# EAGLE board schemat (EAGLE 9.1.3)
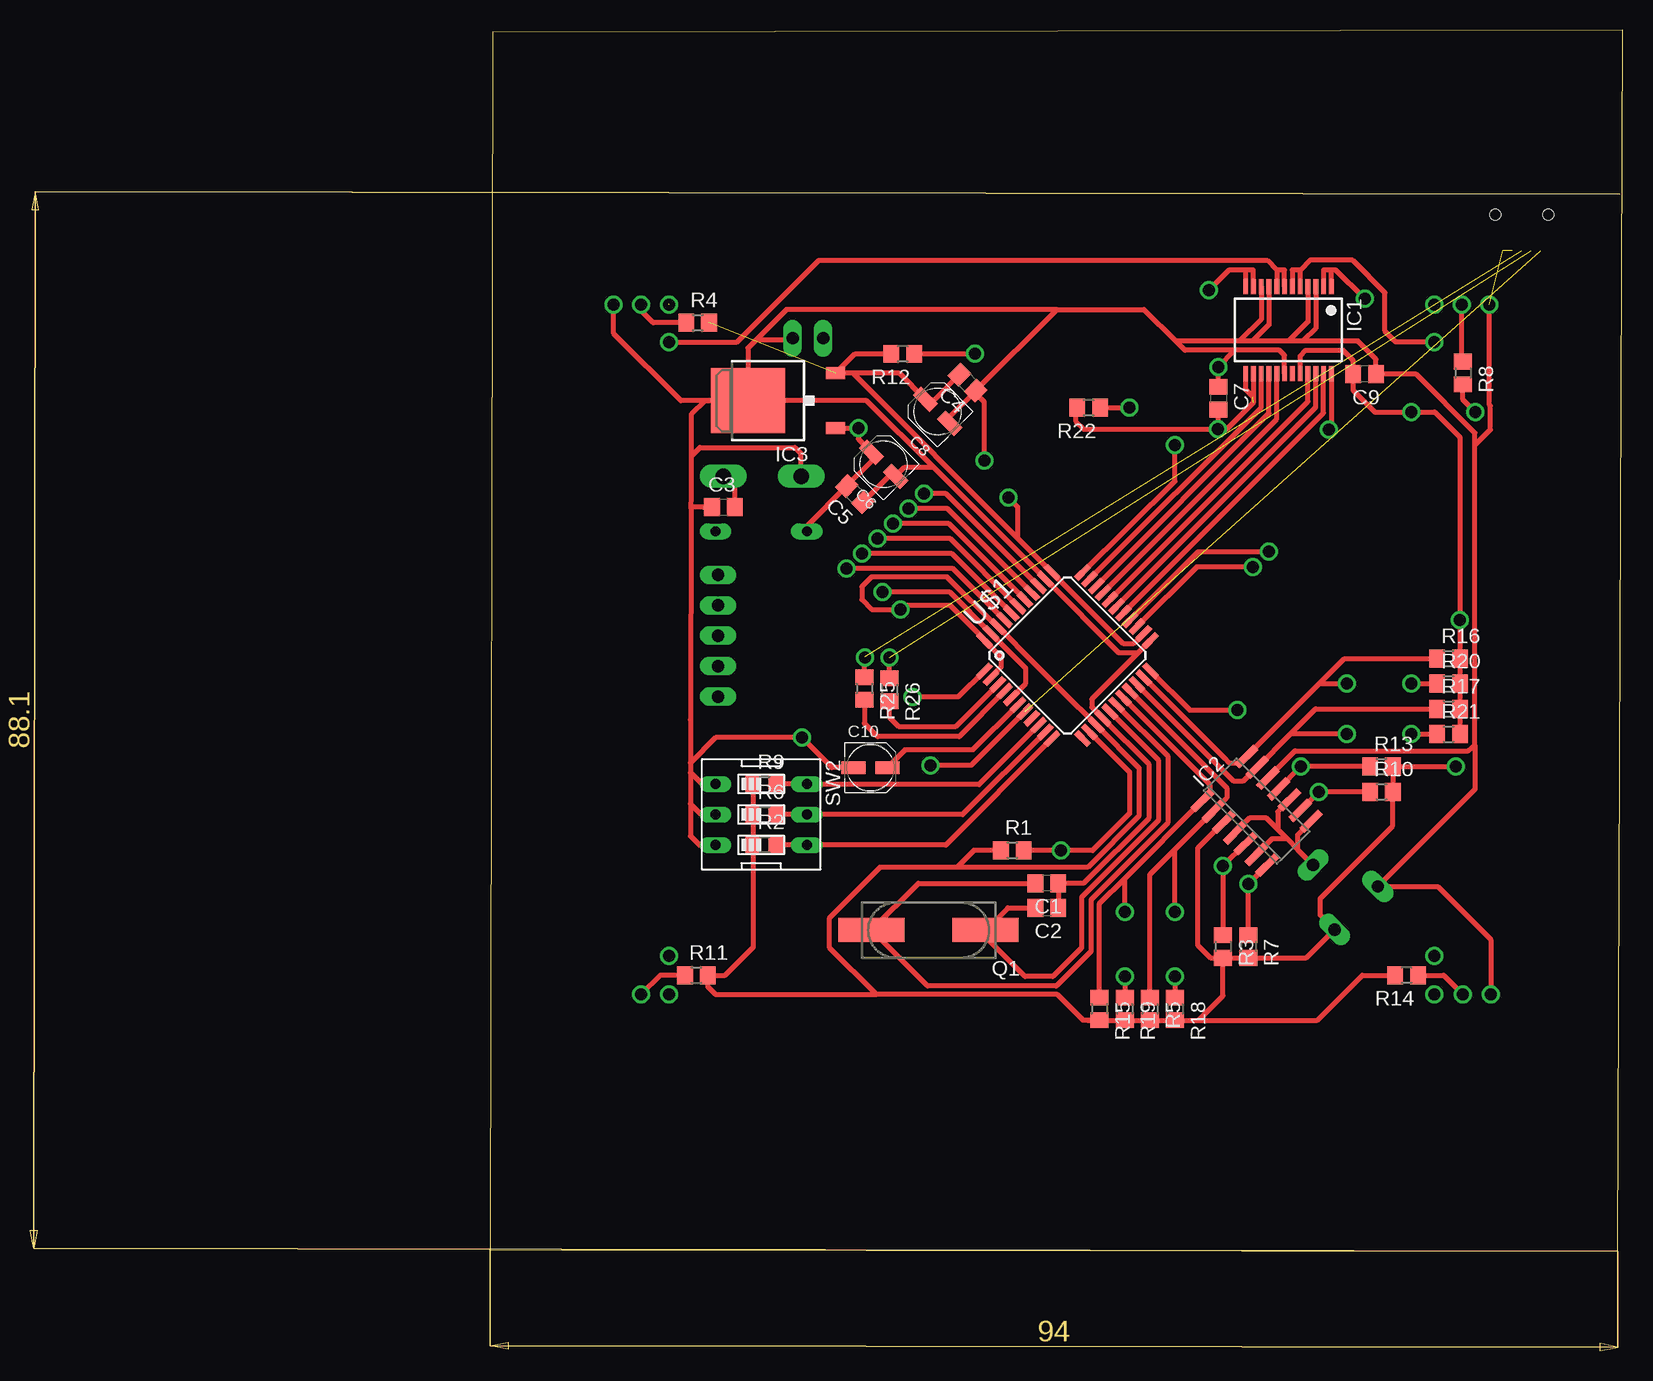
[diagram p0: board, top side]
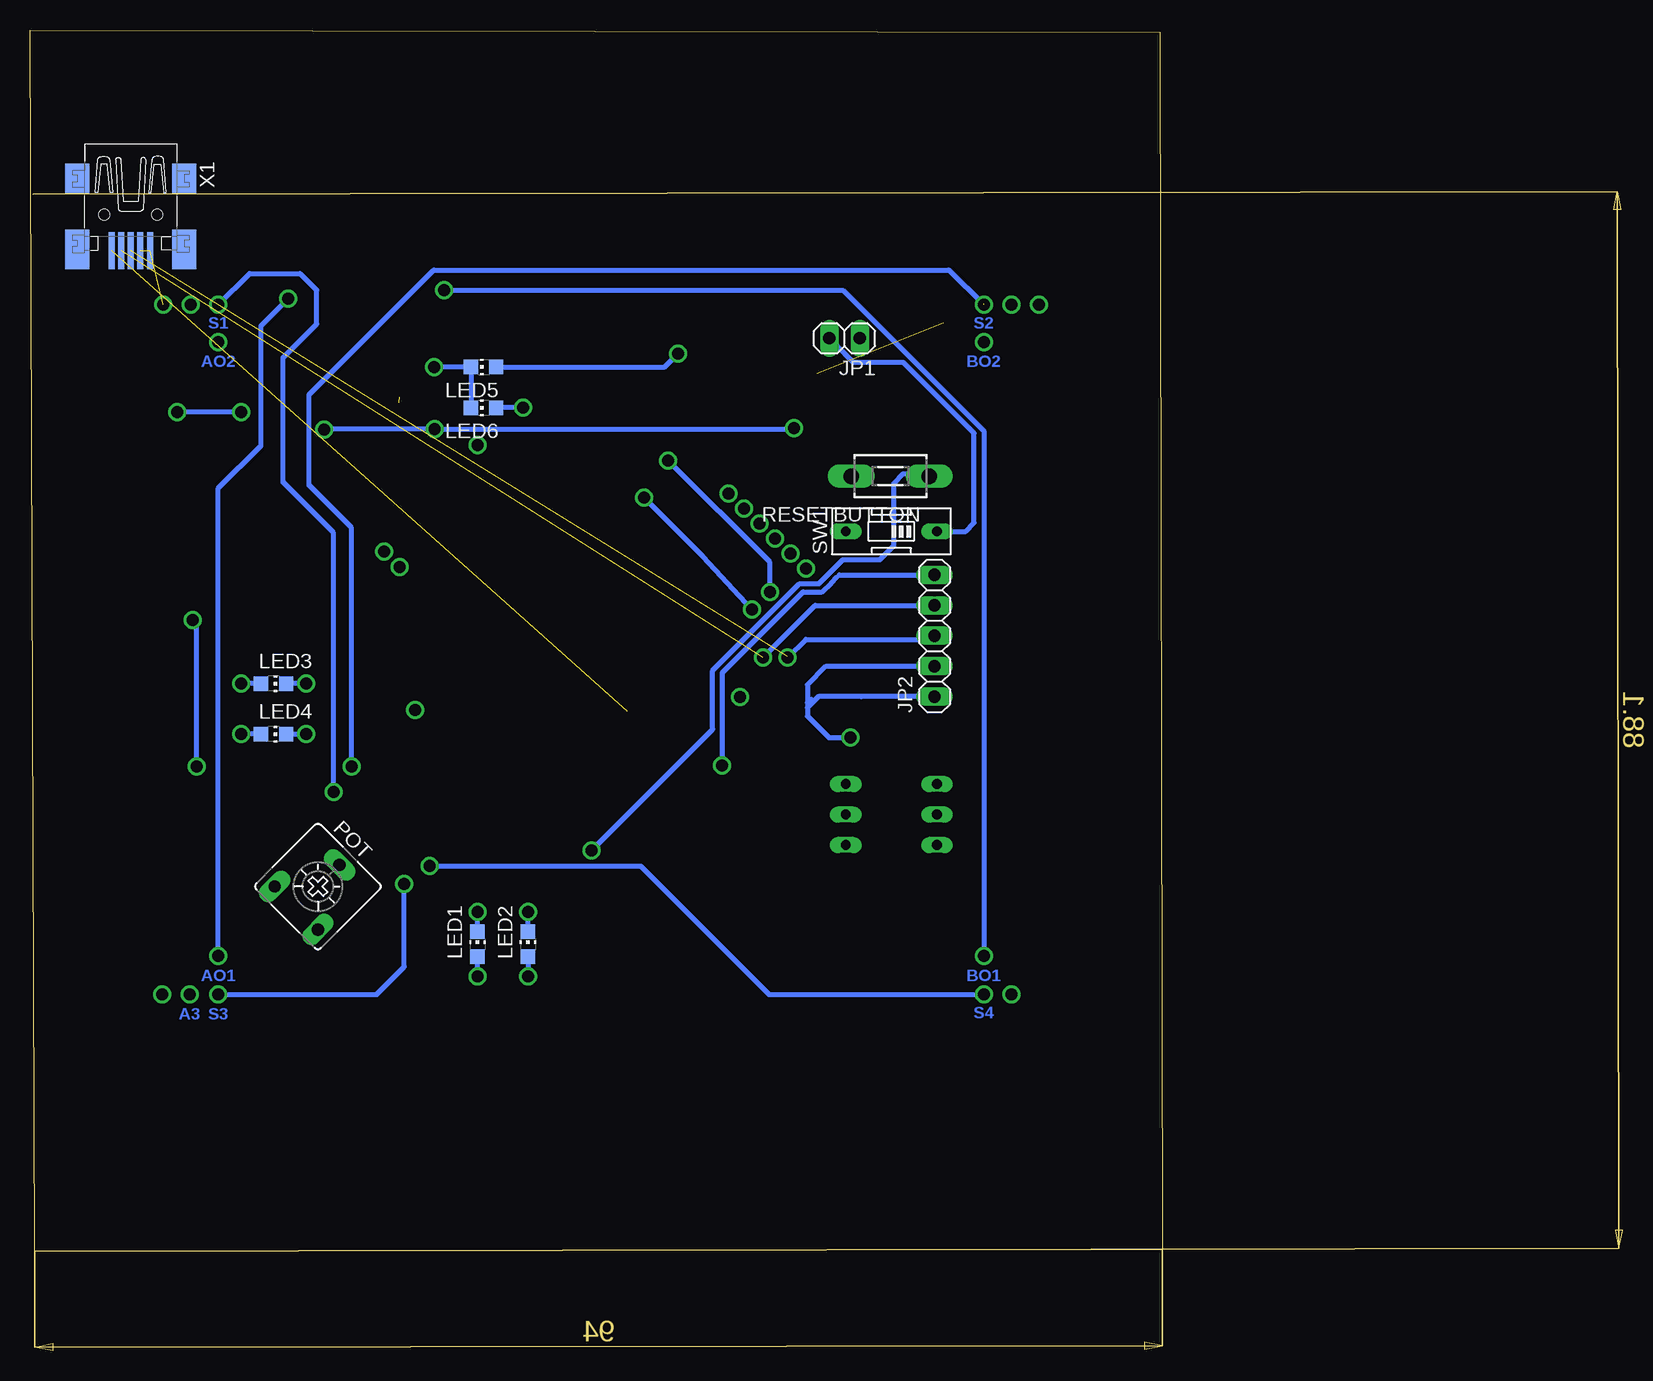
[diagram p1: board, bottom side, seen from below]

Size 132.75 x 110.09 mm. Coordinates in mm from the lower left corner, seen from the top.
Outline: 38.35,8.39 132.35,8.29 132.75,110.09 38.55,109.89 38.35,8.39
Copper layers (1*16): Top 0.035mm / dielectric 1.5mm / Bottom 0.035mm
Design rules "default *": minimum track width 6mil, minimum drill 0.35mm, track to track 0.3mm, track to pad 0.3mm, pad to pad 0.3mm, via to via 0.3mm, smd to smd 6mil, copper to edge 6mil, drill to drill 6mil, minimum pad ring 10mil, minimum via ring 8mil, stop-mask expansion 4mil, vias tented up to drill 0mil, thermal gap 10mil

## Footprints (pad centres in the part's own frame; a part is rotated, then mirrored left to right if it is on the bottom)
C0805 = smd 1.3 x 1.5: 1 -0.95,0; 2 0.95,0
UD-4X5,8_NICHICON = smd 2 x 1: + 1.425,0; - -1.425,0
SSOP24 = smd 0.4 x 1.25: 1 -3.575,-3.625; 2 -2.925,-3.625; 3 -2.275,-3.625; 4 -1.625,-3.625; 5 -0.975,-3.625; 6 -0.325,-3.625; 7 0.325,-3.625; 8 0.975,-3.625; 9 1.625,-3.625; 10 2.275,-3.625; 11 2.925,-3.625; 12 3.575,-3.625; 13 3.575,3.625; 14 2.925,3.625; 15 2.275,3.625; 16 1.625,3.625; 17 0.975,3.625; 18 0.325,3.625; 19 -0.325,3.625; 20 -0.975,3.625; 21 -1.625,3.625; 22 -2.275,3.625; 23 -2.925,3.625; 24 -3.575,3.625
SO14 = smd 0.6 x 2.2: 1 -3.81,-2.6; 2 -2.54,-2.6; 3 -1.27,-2.6; 4 0,-2.6; 5 1.27,-2.6; 6 2.54,-2.6; 7 3.81,-2.6; 8 3.81,2.6; 9 2.54,2.6; 10 1.27,2.6; 11 0,2.6; 12 -1.27,2.6; 13 -2.54,2.6; 14 -3.81,2.6
TO252 = smd 1 x 1.6: 1 -2.28,-4.8; 2 2.28,-4.8 | smd 5.4 x 6.2: 3 0,2.5
1X02 = drill 1.016 long: 1 -1.27,0; 2 1.27,0
1X05 = drill 1.016 long: 1 -5.08,0; 2 -2.54,0; 3 0,0; 4 2.54,0; 5 5.08,0
CHIP-LED0805 = smd 1.2 x 1.2: A 0,-1.05; C 0,1.05
CA6V = drill 1.016 long: A -2.54,-2.54; E 2.54,-2.54; S 0,2.54
CSM-7X-DU = smd 5.5 x 2: 1 -4.75,0; 2 4.75,0
R0805 = smd 1.3 x 1.5: 1 -0.95,0; 2 0.95,0
DTS-3 = drill 1.3 long: 1 -3.25,0; 2 3.25,0
EDG-01 = drill 0.813 long: 1 0,-3.81; 2 0,3.81
EDG-03 = drill 0.813 long: 1 -2.54,-3.81; 2 0,-3.81; 3 2.54,-3.81; 4 2.54,3.81; 5 0,3.81; 6 -2.54,3.81
TQFP44 = smd 1.5 x 0.5: 1 -5.8,4; 2 -5.8,3.2; 3 -5.8,2.4; 4 -5.8,1.6; 5 -5.8,0.8; 6 -5.8,0; 7 -5.8,-0.8; 8 -5.8,-1.6; 9 -5.8,-2.4; 10 -5.8,-3.2; 11 -5.8,-4; 23 5.8,-4; 24 5.8,-3.2; 25 5.8,-2.4; 26 5.8,-1.6; 27 5.8,-0.8; 28 5.8,0; 29 5.8,0.8; 30 5.8,1.6; 31 5.8,2.4; 32 5.8,3.2; 33 5.8,4 | smd 0.5 x 1.5: 12 -4,-5.8; 13 -3.2,-5.8; 14 -2.4,-5.8; 15 -1.6,-5.8; 16 -0.8,-5.8; 17 0,-5.8; 18 0.8,-5.8; 19 1.6,-5.8; 20 2.4,-5.8; 21 3.2,-5.8; 22 4,-5.8; 34 4,5.8; 35 3.2,5.8; 36 2.4,5.8; 37 1.6,5.8; 38 0.8,5.8; 39 0,5.8; 40 -0.8,5.8; 41 -1.6,5.8; 42 -2.4,5.8; 43 -3.2,5.8; 44 -4,5.8
32005-301 = smd 3.1 x 0.5: 1 3,1.6; 2 3,0.8; 3 3,0; 4 3,-0.8; 5 3,-1.6 | smd 2.5 x 2: M1 -3,-4.45; M2 -3,4.45 | smd 3.3 x 2: M3 2.9,4.45; M4 2.9,-4.45 | hole 0.9: 0,2.2; 0,-2.2

## Placement (x,y rotation side)
C1  1.0uF  [C0805]  84.76,38.96 180 top
C2  1.0uF  [C0805]  84.76,36.91 180 top
C3  100nF  [C0805]  57.8,70.31 0 top
C4  100nF  [C0805]  78.15,80.69 135 top
C5  330nF  [C0805]  68.75,71.39 135 top
C6  10uF  [UD-4X5,8_NICHICON]  71.15,73.89 135 top
C7  100nF  [C0805]  99.05,79.39 270 top
C8  10uF  [UD-4X5,8_NICHICON]  75.65,78.29 135 top
C9  100nF  [C0805]  111.25,81.39 180 top
C10  1uF  [UD-4X5,8_NICHICON]  70.05,48.59 0 top
IC1  TB6612FNG  [SSOP24]  104.9,85.08 180 top
IC2  LM339D  [SO14]  102.25,44.99 315 top
IC3  7806DT  [TO252]  62.35,79.19 90 top
JP1  [1X02]  64.85,84.39 180 bottom
JP2  [1X05]  57.35,59.59 90 bottom
LED1  [CHIP-LED0805]  95.45,33.89 0 bottom
LED2  [CHIP-LED0805]  91.25,33.89 0 bottom
LED3  [CHIP-LED0805]  112.45,55.59 270 bottom
LED4  [CHIP-LED0805]  112.45,51.39 270 bottom
LED5  [CHIP-LED0805]  94.95,81.99 90 bottom
LED6  [CHIP-LED0805]  94.95,78.59 90 bottom
POT  100k  [CA6V]  108.75,38.69 315 bottom
Q1  16MHz  [CSM-7X-DU]  74.9,35.05 180 top
R1  10k  [R0805]  81.89,41.72 0 top
R2  10k  [R0805]  61.25,42.19 0 top
R3  10k  [R0805]  99.45,33.69 270 top
R4  180R  [R0805]  55.65,85.69 0 top
R5  10k  [R0805]  93.35,28.49 270 top
R6  10k  [R0805]  61.25,44.69 0 top
R7  10k  [R0805]  101.55,33.69 270 top
R8  180R  [R0805]  119.45,81.49 270 top
R9  10k  [R0805]  61.25,47.19 0 top
R10  10k  [R0805]  112.65,46.59 0 top
R11  180R  [R0805]  55.55,31.29 0 top
R12  220R  [R0805]  72.75,83.09 180 top
R13  10k  [R0805]  112.65,48.69 0 top
R14  180R  [R0805]  114.75,31.29 180 top
R15  10k  [R0805]  89.15,28.49 270 top
R16  10k  [R0805]  118.25,57.69 0 top
R17  10k  [R0805]  118.25,53.49 0 top
R18  220R  [R0805]  95.45,28.49 270 top
R19  220R  [R0805]  91.25,28.49 270 top
R20  220R  [R0805]  118.25,55.59 0 top
R21  220R  [R0805]  118.25,51.39 0 top
R22  220R  [R0805]  88.25,78.59 180 top
R25  22R  [R0805]  69.55,55.19 270 top
R26  22R  [R0805]  71.65,55.09 270 top
RESETBUTTON  DTS-3  [DTS-3]  61.03,72.9 180 bottom
SW1  [EDG-01]  60.95,68.29 90 bottom
SW2  [EDG-03]  60.95,44.69 270 top
U$1  ATMEGA32U4-AU  [TQFP44]  86.47,57.94 45 top
X1  MINI-USB-32005-301  [32005-301]  124.35,94.69 270 bottom

## Library data of the parts
C1-C10 = rcl; SPICEPREFIX: C
IC1 U$1 = adafruit
IC2 = linear
IC3 = linear3
JP1 JP2 = pinhead
LED1-LED6 = led
POT = pot
Q1 = crystal; OC_FARNELL: unknown; OC_NEWARK: unknown
R1-R22 R25 R26 = rcl; SPICEPREFIX: R
RESETBUTTON = switch-tact (1)
SW1 SW2 = special
X1 = con-cypressindustries; OC_FARNELL: unknown; OC_NEWARK: unknown

## Nets
AIN1: IC1.21 U$1.29
AIN2: IC1.22 U$1.28
AO1: IC1.1 IC1.2
AO2: IC1.5 IC1.6
BIN1: IC1.17 U$1.30
BIN2: IC1.16 U$1.31
BO1: IC1.11 IC1.12
BO2: IC1.7 IC1.8
D+: R25.2 U$1.4
D-: R26.2 U$1.3
FL1: IC2.2 LED1.C R5.1 U$1.19
FL2: IC2.1 LED2.C R15.1 U$1.18
FL3: IC2.14 LED3.C R16.1 U$1.21
FL4: IC2.13 LED4.C R17.1 U$1.20
GND: C1.1 C2.1 C3.1 C4.1 C5.1 C6.- C7.1 C8.- C9.1 C10.- IC1.3 IC1.4 IC1.9 IC1.10 IC1.18 IC2.12 IC3.3 JP1.1 JP2.1 JP2.2 LED5.C LED6.C POT.A RESETBUTTON.2 SW2.1 SW2.2 SW2.3 U$1.5 U$1.15 U$1.23 U$1.35 U$1.43 X1.1 X1.2
I/O1: U$1.41
I/O2: U$1.40
I/O3: U$1.39
I/O4: U$1.38
I/O5: U$1.37
I/O6: U$1.36
I/O7: U$1.26
I/O8: U$1.22
I/O9: U$1.25
I/O10: U$1.33
I/O11: U$1.1
I/O12: U$1.12
MISO: R2.2 SW2.4 U$1.11
MOSI: R6.2 SW2.5 U$1.10
N$1: R4.1
N$7: LED5.A R12.1
N$9: LED6.A R22.1
N$12: JP2.3 R25.1 X1.3
N$13: LED1.A R18.1
N$15: LED2.A R19.1
N$16: LED3.A R20.1
N$17: LED4.A R21.1
N$19: R8.1
N$20: JP2.4 R26.1 X1.4
N$23: R11.1
N$27: R14.1
PIN: JP1.2 SW1.1
POT: IC2.4 IC2.6 IC2.8 IC2.10 POT.S
PWMA: IC1.23 U$1.27
PWMB: IC1.15 U$1.32
RST: C3.2 R1.2 RESETBUTTON.1 U$1.13
S1: IC2.5 R3.1
S2: IC2.7 R7.1
S3: IC2.9 R10.1
S4: IC2.11 R13.1
SCK: R9.2 SW2.6 U$1.9
STBY: IC1.19
UCAP: C10.+ U$1.6
VBUS: JP2.5 U$1.7 X1.5
VCC: C4.2 C8.+ C9.2 IC1.20 IC2.3 IC3.2 POT.E R1.1 R2.1 R3.2 R4.2 R5.2 R6.1 R7.2 R8.2 R9.1 R10.2 R11.2 R12.2 R13.2 R14.2 R15.2 R16.2 R17.2 R18.2 R19.2 R20.2 R21.2 U$1.2 U$1.14 U$1.24 U$1.34 U$1.42 U$1.44
VM: C5.2 C6.+ C7.2 IC1.13 IC1.14 IC1.24 IC3.1 R22.2 SW1.2
XTAL1: C1.2 Q1.2 U$1.17
XTAL2: C2.2 Q1.1 U$1.16

## Tracks (layer width: path | path; a pad name or v marks a point on that pad's centre or on a via)
AIN1
  Top 0.4: U$1.29 106.53,79.13 IC1.21
AIN2
  Top 0.4: U$1.28 107.18,78.65 IC1.22
AO1  (via drill 1 pad 1.3)
  Top 0.4: IC1.2 107.83,90.09 108.48,90.09 | IC1.1 108.48,90.09 | v111.25,87.69 108.85,90.09 108.48,90.09
  Bottom 0.4: v111.25,87.69 113.5,85.44 113.5,75.44 117.05,71.89 v117.05,32.89
AO2  (via drill 1 pad 1.3)
  Top 0.4: IC1.6 105.23,90.09 105.88,90.09 | IC1.5 105.88,90.09 | 105.88,90.09 106.68,90.89 110.25,90.89 112.95,88.19 112.95,84.99 113.85,84.09 v117.05,84.09
BIN1
  Top 0.4: U$1.30 103.93,77.66 IC1.17
BIN2
  Top 0.4: U$1.31 103.28,78.14 IC1.16
BO1  (via drill 1 pad 1.3)
  Top 0.4: 101.33,90.09 IC1.12 | IC1.11 101.98,90.09 101.33,90.09 | 101.33,90.09 99.95,90.09 v98.25,88.39
  Bottom 0.4: v53.25,32.89 53.25,76.66 64.99,88.39 v98.25,88.39
BO2  (via drill 1 pad 1.3)
  Top 0.4: 103.93,90.09 IC1.8 | IC1.7 104.58,90.09 103.93,90.09 | 103.93,90.09 103.13,90.89 65.75,90.89 58.95,84.09 v53.25,84.09
D+
  Top 0.4: U$1.4 77.46,51.19 70.65,51.19 69.55,52.29 R25.2
D-
  Top 0.4: U$1.3 77.13,51.99 72.45,51.99 71.65,52.79 R26.2
FL1  (via drill 1 pad 1.4)
  Top 0.4: U$1.19 99.75,46.93 99.75,46.09 IC2.2 95.45,41.79 | R5.1 93.35,39.69 95.45,41.79 | 95.45,36.49 v95.45,36.59 95.45,41.79
  Bottom 0.4: LED1.C v95.45,36.59
FL2  (via drill 1 pad 1.4)
  Top 0.4: 97.75,47.79 | U$1.18 97.75,47.79 | 97.75,47.79 98.35,47.19 98.35,46.48 IC2.1 91.25,39.38 | v91.25,36.59 91.25,39.38 | R15.1 89.15,37.28 91.25,39.38
  Bottom 0.4: LED2.C v91.25,36.59
FL3  (via drill 1 pad 1.4)
  Top 0.4: 99.55,49.39 | U$1.21 99.55,49.39 | 99.55,49.39 99.95,48.99 100.85,48.99 IC2.14 | v109.75,55.59 107.46,55.59 IC2.14 | R16.1 109.56,57.69 IC2.14
  Bottom 0.4: v109.75,55.59 LED3.C
FL4  (via drill 1 pad 1.4)
  Top 0.4: U$1.20 100.32,47.49 101.15,47.49 IC2.13 105.06,51.39 | R17.1 107.16,53.49 105.06,51.39 | v109.75,51.39 105.06,51.39
  Bottom 0.4: LED4.C v109.75,51.39
GND  (via drill 1, 1 pad 1.3)  (2 unrouted)
  Top 0.4: C10.- 66.85,48.59 v64.35,51.09 57.15,51.09 55.05,48.99 | 57.3,54.46 JP2.1 | 55.12,70.19 55.05,52.59 55.05,48.99 | 55.12,70.19 55.24,70.31 C3.1 56.11,70.31 | 55.12,70.19 55.13,71.29 55.14,74.59 | 55.14,74.59 55.84,75.29 63.75,75.29 64.28,74.76 RESETBUTTON.2 | 55.14,74.59 55.15,78.09 56.25,79.19 IC3.3 | IC3.3 54.25,79.19 48.65,84.79 v48.65,87.19 | IC3.3 59.85,83.59 60.55,84.29 | IC3.3 69.75,79.19 75.3,73.64 | 60.55,84.29 63.48,84.29 JP1.1 | 60.55,84.29 63.05,86.79 85.6,86.79 | 75.3,73.64 72.92,73.64 C6.- 71.59,72.89 C5.1 | 75.3,73.64 U$1.35 90.75,58.19 92.38,58.19 U$1.23 88.51,54.32 88.51,53.65 89.01,53.15 | 85.6,86.79 92.87,86.79 95.47,84.19 | 85.6,86.79 C4.1 78.72,79.92 | 78.72,79.92 76.66,77.86 C8.- | 95.47,84.19 96.27,83.39 100.45,83.39 | 95.47,84.19 100.85,84.19 | 100.85,84.19 102.63,85.97 IC1.10 | 100.85,84.19 101.95,84.19 | v99.05,81.99 100.45,83.39 | 100.45,83.39 104.15,83.39 104.58,82.97 IC1.18 | 101.95,84.19 103.28,85.52 IC1.9 | 101.95,84.19 104.95,84.19 | 88.94,53.15 89.01,53.15 | 89.01,53.15 U$1.15 93.25,48.9 93.25,44.38 87.83,38.96 C1.1 C2.1 | 104.95,84.19 106.53,85.77 IC1.4 | 104.95,84.19 106.15,84.19 | C7.1 v99.05,81.99 | v99.05,81.99 98.55,81.99 | 106.15,84.19 107.18,85.22 IC1.3 | 106.15,84.19 110.65,84.19 112.2,82.64 C9.1 115.55,81.39 120.45,76.49 120.45,75.49 | U$1.5 83.01,55.62 83.01,56.19 83.01,56.88 U$1.43 76.67,63.22 v71.08,63.22 | 120.45,75.49 121.74,76.78 121.74,78.75 121.65,78.83 v121.65,87.19 | 120.45,50.44 120.45,75.49 | 120.45,50.44 120.45,46.8 POT.A 117.35,38.69 121.75,34.29 v121.75,29.69 | 120.45,50.44 119.91,49.99 105.46,49.99 IC2.12 | 55.05,48.99 55.05,48.19 | 55.05,48.19 55.05,45.59
  Top 0.4: 55.05,45.59 55.05,42.89 55.79,42.15 SW2.3 | SW2.2 55.95,44.69 55.05,45.59 | SW2.1 56.01,47.23 55.05,48.19 | v79.55,74.19 79.55,79.09 78.72,79.92
  Bottom 0.4: 67.95,53.99 67.95,55.49 66.39,57.05 JP2.2 | 67.95,53.99 67.95,53.59 | 67.95,53.59 67.95,52.89 66.15,51.09 v64.35,51.09 | 67.95,53.99 67.63,54.31 | 67.95,53.59 67.03,54.51 JP2.1 63.45,54.51 | v99.05,81.99 LED5.C LED6.C | v71.08,63.22 71.08,65.72 v79.55,74.19
I/O1  (via drill 1 pad 1.3)
  Top 0.4: U$1.41 76.96,65.2 v68.06,65.2 v68.05,65.19
I/O2  (via drill 1 pad 1.3)
  Top 0.4: U$1.40 76.84,66.45 v69.34,66.45
I/O3  (via drill 1 pad 1.3)
  Top 0.4: v70.64,67.7 76.72,67.7 U$1.39
I/O4  (via drill 1 pad 1.3)
  Top 0.4: v71.94,68.95 76.6,68.95 U$1.38
I/O5  (via drill 1 pad 1.3)
  Top 0.4: U$1.37 76.48,70.2 v73.23,70.2
I/O6  (via drill 1 pad 1.3)
  Top 0.4: v74.53,71.45 76.36,71.45 U$1.36
I/O7  (via drill 1 pad 1.3)
  Top 0.4: v103.25,66.59 97.39,66.59 92.57,61.78 U$1.26
I/O8  (via drill 1 pad 1.3)
  Top 0.4: U$1.22 96.68,53.39 v100.65,53.39
I/O9  (via drill 1 pad 1.3)
  Top 0.4: v101.96,65.34 97.27,65.34 U$1.25
I/O10  (via drill 1 pad 1.3)
  Top 0.4: U$1.33 95.45,72.48 v95.45,75.49
I/O11  (via drill 1 pad 1.3)
  Top 0.4: U$1.1 77.37,54.49 v73.55,54.49
MISO
  Top 0.4: U$1.11 76.34,42.15 SW2.4 62.24,42.15 R2.2
MOSI
  Top 0.4: 84.7,51.58 U$1.10 77.75,44.69 SW2.5 R6.2
N$1  (via drill 1 pad 1.3)
  Top 0.4: R4.1 51.95,85.69 50.95,86.69 v50.95,87.19
N$7  (via drill 1 pad 1.3)
  Top 0.4: R12.1 v78.75,83.09
  Bottom 0.4: v78.75,83.09 79.85,81.99 LED5.A
N$9  (via drill 1 pad 1.3)
  Top 0.4: R22.1 v91.65,78.59
  Bottom 0.4: v91.65,78.59 LED6.A
N$12  (via drill 1 pad 1.3)  (1 unrouted)
  Top 0.4: R25.1 69.55,57.74 v69.59,57.78 | 57.45,59.49 JP2.3
  Bottom 0.4: 69.59,57.88 v69.59,57.78 68.08,59.29 57.65,59.29 JP2.3
N$13  (via drill 1 pad 1.4)
  Top 0.4: v95.45,31.19 R18.1
  Bottom 0.4: v95.45,31.19 LED1.A
N$15  (via drill 1 pad 1.4)
  Top 0.4: v91.25,31.19 R19.1
  Bottom 0.4: LED2.A v91.25,31.19
N$16  (via drill 1 pad 1.4)
  Top 0.4: v115.15,55.59 R20.1
  Bottom 0.4: LED3.A v115.15,55.59
N$17  (via drill 1 pad 1.4)
  Top 0.4: v115.15,51.39 R21.1
  Bottom 0.4: LED4.A v115.15,51.39
N$19  (via drill 1 pad 1.3)
  Top 0.4: R8.1 119.35,82.44 v119.35,87.19
N$20  (via drill 1 pad 1.3)  (1 unrouted)
  Top 0.4: R26.1 v71.65,57.79
  Bottom 0.4: v71.65,57.79 67.31,62.13 JP2.4
N$23  (via drill 1 pad 1.3)
  Top 0.4: R11.1 52.55,31.29 v50.95,29.69
N$27  (via drill 1 pad 1.3)
  Top 0.4: v119.45,29.69 117.85,31.29 R14.1
PIN
  Top 0.4: 57.25,68.4 SW1.1
  Bottom 0.4: JP1.2 64.84,83.12 64.84,83.11 64.11,82.37 59.95,82.37 54.05,76.47 54.05,68.99 54.75,68.29 SW1.1
POT
  Top 0.4: IC2.4 101.7,44.44 103,44.44 104,43.44 | 104,43.44 104.75,42.69 | 104.75,42.69 105.65,41.79 | IC2.10 104,44.95 104,43.44 | IC2.8 105.65,43.01 105.65,41.79 | IC2.6 103.54,42.69 104.75,42.69 | 105.65,41.79 POT.S
PWMA
  Top 0.4: U$1.27 92.4,62.74 107.83,78.17 IC1.23
PWMB
  Top 0.4: U$1.32 102.63,78.62 IC1.15
RST  (via drill 1 pad 1.3)
  Top 0.4: U$1.13 91.65,48.24 91.65,44.76 88.58,41.69 v85.95,41.69 82.86,41.69 R1.2 | C3.2 58.75,71.93 RESETBUTTON.1
  Bottom 0.4: v85.95,41.69 75.85,51.79 75.85,56.68 68.59,63.94 67,63.94 65,65.94 61.9,65.94 60.75,67.09 60.75,72.29 59.95,73.09 57.97,73.09 RESETBUTTON.1
S1  (via drill 1 pad 1.3, 1 pad 1.4)
  Top 0.4: 99.35,40.3 v99.45,40.39 | IC2.5 v99.45,40.39 | v99.45,40.39 R3.1
  Bottom 0.4: v99.45,40.39 81.85,40.39 71.16,29.7 v53.25,29.7
S2  (via drill 1 pad 1.3)
  Top 0.4: IC2.7 101.55,38.91 v101.55,38.89 R7.1
  Bottom 0.4: v101.55,38.89 101.55,31.99 103.85,29.69 v117.05,29.69
S3  (via drill 1 pad 1.3, 1 pad 1.4)
  Top 0.4: IC2.9 v107.44,46.59 v107.45,46.59 R10.1
  Bottom 0.4: v107.45,46.59 107.45,68.19 111.65,72.39 111.65,82.79 108.85,85.59 108.85,88.39 110.25,89.79 114.45,89.79 v117.05,87.19
S4  (via drill 1, 1 pad 1.3, 1 pad 1.4)  (1 unrouted)
  Top 0.4: R13.1 v105.95,48.69 IC2.11
  Bottom 0.4: 53.32,87.26 53.25,87.26 | v53.25,87.19 56.15,90.09 99.1,90.09 109.5,79.69 109.5,72.14 105.95,68.59 v105.95,48.69
SCK
  Top 0.4: U$1.9 79.12,47.19 64.8,47.19 SW2.6 62.24,47.23 R9.2
UCAP
  Top 0.4: U$1.6 78.62,50.09 72.98,50.09 C10.+
VBUS  (via drill 1 pad 1.3)  (1 unrouted)
  Top 0.4: U$1.7 78.45,48.79 v75.05,48.79
  Bottom 0.4: v75.05,48.79 75.05,56.49 68.3,63.24 66.71,63.24 65.96,64 65.48,64.47 65.28,64.67 JP2.5
VCC  (via drill 1, 1 pad 1.3)  (1 unrouted)
  Top 0.4: IC2.3 97.35,41.89 97.35,33.79 98.4,32.74 R3.2 | R5.2 R19.2 R15.2 87.8,27.54 85.65,29.69 70.55,29.69 | R5.2 R18.2 97.4,27.54 | 70.55,29.69 66.65,33.59 66.65,36.09 70.85,40.29 77.25,40.29 | 82.32,67.76 U$1.34 91.12,58.96 92.01,58.96 U$1.24 | 82.32,67.76 68.6,81.47 | 68.6,81.47 IC3.2 68.77,83.09 R12.2 | C4.2 75.42,79.3 C8.+ 72.47,81.47 68.6,81.47 | 97.4,27.54 99.45,29.59 R3.2 | R3.2 R7.2 106.39,32.74 POT.E 107.55,36.3 107.55,37.69 113.6,43.74 R10.2 R13.2 v118.85,48.69 | 77.25,40.29 88.17,40.29 92.45,44.57 92.45,48.57 U$1.14 86.04,54.98 83.74,57.28 U$1.42 80.6,60.35 76.45,64.5 70.15,64.5 69.35,63.7 69.35,62.59 70.15,61.79 v72.55,61.79 72.85,62.09 76.74,62.09 79.54,59.29 U$1.44 80.95,57.81 80.95,56.99 80.11,56.15 U$1.2 | R1.1 78.68,41.72 77.25,40.29 | 70.55,29.69 57.15,29.69 56.5,30.34 R11.2 | 97.4,27.54 107.3,27.54 111.05,31.29 R14.2 | 56.5,31.54 R11.2 | R21.2 R17.2 R20.2 R16.2 v119.2,60.89 119.2,76.14 117.1,78.24 v115.15,78.24 112.1,78.24 110.3,80.04 C9.2 | v120.49,78.23 119.45,79.26 R8.2 | 110.25,81.39 C9.2 | C9.2 110.3,82.54 109.45,83.39 106.35,83.39 105.88,82.92 IC1.20 | R11.2 57.95,31.29 60.3,33.64 R2.1 R6.1 R9.1 | v81.55,71.09 82.32,70.33 82.32,67.76 | 88.15,27.54 R5.2
  Bottom 0.4: v115.15,78.24 120.47,78.24 v120.49,78.23 | v72.55,61.79 76.65,66.19 v81.55,71.09 | v118.85,48.69 118.85,60.54 v119.2,60.89
VM  (via drill 1, 1 pad 1.3)  (1 unrouted)
  Top 0.4: SW1.2 64.76,68.75 C5.2 70.14,74.13 C6.+ 69.05,75.99 v69.05,76.89 69.03,76.91 IC3.1 | v99.04,76.81 99.76,76.81 101.98,79.02 IC1.14 | v99.04,76.81 87.84,76.81 87.15,77.49 87.15,78.19 87.4,78.44 R22.2 | v99.04,76.81 99.04,78.43 C7.2 | v108.25,76.79 108.48,77.02 IC1.24 | 101.93,79.49 101.93,79.54 101.33,80.14 IC1.13
  Bottom 0.4: v69.05,76.89 69.14,76.81 v99.04,76.81 108.24,76.81 v108.25,76.79
XTAL1
  Top 0.4: U$1.17 94.85,49.56 94.85,43.99 88.45,37.59 88.45,33.29 85.55,30.39 74.81,30.39 Q1.2 74.06,38.96 C1.2
XTAL2
  Top 0.4: U$1.16 94.05,49.23 94.05,44.19 87.65,37.79 87.65,33.59 85.25,31.19 82.95,31.19 79.65,34.49 Q1.1 81.51,36.91 C2.2

## Text on the board
Bottom: S2 | S1 | BO2 | AO2 | BO1 | AO1 | S4 | S3 | A3